# Altium PCB RGBParkLight16.PCBDOC
Units mm, origin at the board's own origin, x right, y up, seen from the top; angles counter-clockwise.
Board outline 152.4 x 101.6 mm, 2 copper layers (Top Layer, Bottom Layer); 19 components, 33 nets, 75 pads, 21 vias.
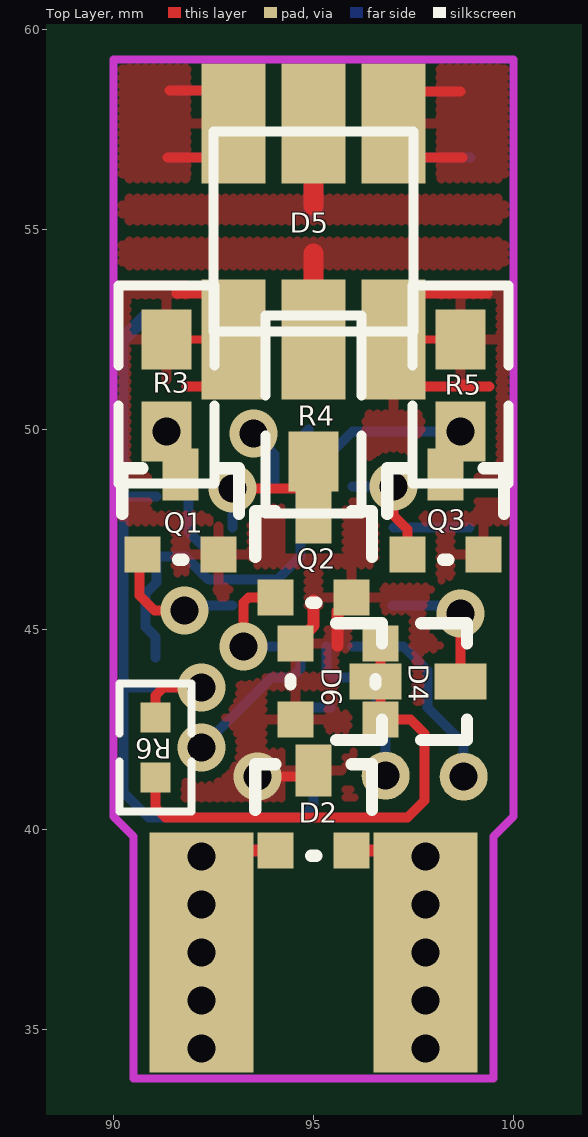
[diagram p0: Top Layer view]
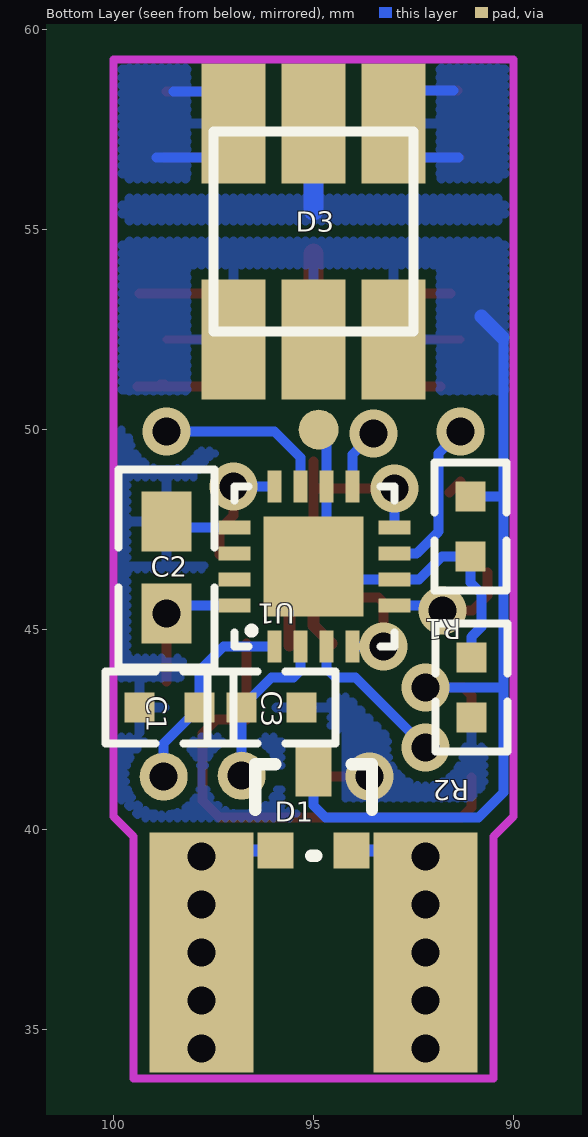
[diagram p1: Bottom Layer view, seen from below]

## Layer stack, top to bottom
Top Layer: signal copper 0.0356
Dielectric: dielectric 0.32, FR-4, Dk 4.8
Bottom Layer: signal copper 0.0356

## Board outline
25.4,25.4 177.8,25.4 177.8,127 25.4,127

## Design rules (kind name [scope] priority, off if disabled: settings)
Clearance [All] p1 off: gap=0.25
ComponentClearance [All] p1 off: gap=0 collisioncheckmode=0
PolygonConnect [All] p1: connectstyle=Relief reliefconductorwidth=0.254 reliefentries=4 polygonreliefangle="90 Angle"
RoutingLayers [All] p1: top layer=Horizontal bottom layer=Vertical
RoutingVias [All] p1: holewidth=0.711 width=1.27 viastyle="Through Hole" minholewidth=0.711 minwidth=1.27 maxholewidth=0.711 maxwidth=1.27
SolderMaskExpansion [All] p1: expansion=0.102
TestPointUsage [All] p1: valid=0 allowmultiple=FALSE
Testpoint [All] p1: side=15 testpointundercomponent=TRUE minsize=1.016 maxsize=2.54 preferedsize=1.524 minholesize=0 maxholesize=1.016 preferedholesize=0.813 testpointgrid=0.025 style=1023 order=1234567890
Width [All] p1: maxlimit=3 minlimit=0.2 preferedwidth=0.25
16 further rules are at their usual default settings.

## Components (designator, comment, footprint, x,y, rotation, side; value= is the part's Value field where it differs from the comment)
C1 "36pF" 0603 97.85,43.05 r0 bottom
C2 "10uF/6.3V" 0805 98.675,45.4 r90 bottom
C3 "32pF" 0603 96.8,43.05 r180 bottom
D1 "BAV70" SOT-23 95.95,39.475 r180 bottom
D2 "BAW56" SOT-23 94.05,39.475 r0 top
D3 "LED RGB" AF-5060 97,52.25 r180 bottom
D4 "BAT54C" SOT-23 96.675,44.65 r270 top (schematic designator D?)
D5 "LED RGB" AF-5060 97,57.65 r180 top
D6 "BZX84C4V7" SOT-23 94.55,44.65 r270 top
Q1 "DTC114YKA" SOT-23 90.725,46.875 r0 top
Q2 "DTC114YKA" SOT-23 94.05,45.8 r0 top
Q3 "DTC114YKA" SOT-23 97.35,46.875 r0 top
R1 "4k7 1%" 0603 91.075,48.325 r270 bottom
R2 "1k 1%" 0603 91.05,44.3 r270 bottom
R3 "200" 0805 91.325,52.25 r270 top
R4 "56" 0805 95,51.5 r270 top
R5 "56" 0805 98.675,52.25 r270 top
R6 "100" 0603 91.05,42.8 r270 top
U1 "PIC16F1823" QFN16-ML 95.975,44.575 r90 bottom

## Footprints (in the part's own frame and the unit in brackets; to place one, negate y for a bottom-side part, rotate by r counter-clockwise, add the part's x,y. Pads: shape width x height; smd on the part's side, far side on the other; paste and mask are expansions set on the pad)
0603 [mm]
  rect 0.75x0.75 smd: 1(0,0) 2(1.5,0)
  silkscreen extent -0.85,-0.9 2.35,0.9
0805 [mm]
  rect 1.5x1.25 smd: 1(0,0) 2(2.3,0)
  silkscreen extent -1.35,-1.2 3.6,1.2
AF-5060 [mm] "5060 SMD Package for 20 mA RGB LED with 6 pins"
  rect 1.6x3 smd: 1(0,0) 2(2,0) 3(4,0) 4(4,5.4) 5(2,5.4) 6(0,5.4)
  silkscreen extent -0.5,0.2 4.5,5.2
QFN16-ML [mm]
  rect 2.5x2.5 smd: 0(2,-0.975)
  rect 0.8x0.35 smd: 1(0,0) 2(0,-0.65) 3(0,-1.3) 4(0,-1.95) 9(4,-1.95) 10(4,-1.3) 11(4,-0.65) 12(4,0)
  rect 0.35x0.8 smd: 5(1.025,-3) 6(1.675,-3) 7(2.325,-3) 8(2.975,-3) 13(2.975,1) 14(2.325,1) 15(1.675,1) 16(1.025,1)
  silkscreen extent 0,-3 4,1
SOT-23 [mm]
  rect 0.9x0.9 smd: 1(0,0) 3(1.9,0)
  rect 0.9x1.3 smd: 2(0.95,2)
  silkscreen extent -0.51,-0.13 2.41,2.16

## Part data
C1 C2 C3: library part CAP, "Capacitor"
D1 D4: library part "DUAL DIODE BAV70"
D2: library part "DUAL DIODE BAW56"
D3 D5: library part LED
D6: library part ZENER1, "Zener Diode"
Q1 Q2 Q3: library part NPN1, "NPN Transistor"
R1 R2 R3 R4 R5 R6: library part RES1
U1: library part VOLTREG

## Free pads (board coordinates)
  rect 2.6x6 smd: 0(92.2,36.925) 0(97.8,36.925)
  rect 2.6x6 smd far side: 0(92.2,36.925) 0(97.8,36.925)
  round 1 smd far side: 0(94.875,50)
  round 1.2 hole 0.7: 0(96.8,41.35) 0(98.75,41.325)

## Via types
v1: diameter 1.2, hole 0.7, Top Layer to Bottom Layer, 21 vias

## Nets (pads, with @x,y where several pads share a name; then routed paths per layer and width w, separated by ;. In a path a pad name is that pad's centre, name@x,y a point inside that pad or via, vN(x,y) a via of type N, cw(c..) or ccw(c..) an arc to the next point about the centre after c; other vN are vias at no path point)
BLUE: Q3.1 U1.12 | length 2.9
  Top Layer w0.25: v1(97,48.575) 97,47.85 97.35,47.5 Q3.1
  Bottom Layer w0.25: U1.12 v1(97,48.575)
BLUE_IN: Q3.2 R5.2 U1.11 | length 4.3
  Bottom Layer w0.25: U1.11 95.325,49.3 95.975,49.95 v1(98.675,49.95)
D4AA: D3.4 | length 2.5
  Bottom Layer w0.25: 91.375,56.8 D3.4@92.75,56.8 ; 91.5,58.475 D3.4@92.625,58.475
D4AK: D5.3 | length 3
  Top Layer w0.25: 91.35,56.8 D5.3@92.875,56.8 ; 91.4,58.475 D5.3@92.825,58.475
D4BA: D3.5 | length 2.2
  Bottom Layer w0.5: 95,55.475 D3.5
D4BK: D5.2 | length 1.4
  Top Layer w0.5: 95,55.6 D5.2@95,57
D4CA: D3.6 | length 2.8
  Bottom Layer w0.25: D3.6@97.15,56.8 98.925,56.8 ; D3.6@97.425,58.45 98.5,58.45
D4CK: D5.1 | length 3.2
  Top Layer w0.25: D5.1@97.05,56.8 98.725,56.8 ; D5.1@97.175,58.45 98.675,58.45
GND: C1.2 C2.2 C3.2 D2.2 D6.1 D6.3 Q1.3 Q2.3 Q3.3 R2.2 U1.13 | length 6.3
  Top Layer w0.25: v1(93.6,41.325) 94.85,41.325 D2.2 ; Q2.3@95.6,45.45 Q2.3
  Top Layer w0.3: D6.1 95,45.1 95,45.725 ; 95.6,44.6 Q2.3@95.6,45.45
  Bottom Layer w0.25: C3.2@95.05,43.05 C3.2@95.425,43.05 ; U1.13@97,47.55 C2.2@98.9,47.55
GREEN: Q2.1 U1.4 | length 2.9
  Top Layer w0.25: v1(93.25,44.575) 93.25,45.675 93.375,45.8 Q2.1 Q2.1@94.05,45.625
  Bottom Layer w0.25: v1(93.25,44.575) U1.4
GREEN_IN: Q2.2 R4.2 U1.8 | length 4.4
  Top Layer w0.25: v1(92.975,48.525) 94.95,48.525 R4.2@95,48.475 ; Q2.2 R4.2
  Bottom Layer w0.25: U1.8 v1(92.975,48.525)
IN1: D1.1 D2.3 pad.0@97.8,36.925 | length 3.8
  Top Layer w0.25: pad.0@97.65,39.475 v1(97.8,39.325)
  Top Layer w0.3: D2.3 pad.0@97.65,39.475
  Bottom Layer w0.25: pad.0@97.65,39.475 v1(97.8,39.325)
  Bottom Layer w0.3: D1.1 pad.0@97.65,39.475
  other v1: 97.8,34.525 97.8,35.725 97.8,36.925 97.8,38.125
IN2: D1.3 D2.1 pad.0@92.2,36.925 | length 3.6
  Top Layer w0.25: v1(92.2,39.325) pad.0@92.35,39.475
  Top Layer w0.3: pad.0@92.35,39.475 D2.1
  Bottom Layer w0.3: pad.0@92.35,39.475 D1.3
  other v1: 92.2,34.525 92.2,35.725 92.2,36.925 92.2,38.125
MCLR: U1.3 | length 4.7
  Bottom Layer w0.25: v1(92.2,42.05) 93.037,42.887 ; 93.675,43.525 93.037,42.887 ; U1.3 94.675,44.025 94.45,43.8 93.95,43.8 93.037,42.887
NetD5_2: 
NetD5_4: D5.4 R3.1 | length 3.4
  Top Layer w0.2: R3.1 D5.4
  Top Layer w0.25: 91.575,53.4 D5.4@92.5,53.4 ; 91.825,51.075 D5.4@92.6,51.075
NetD5_5: D5.5 R4.1 | length 3.1
  Top Layer w0.25: D5.5@95,51.225 D5.5
  Top Layer w0.5: D5.5@95,52.3 95,54.4
NetD5_6: D5.6 R5.1 | length 6
  Top Layer w0.2: D5.6 R5.1
  Top Layer w0.25: D5.6@97,51.125 D5.6@97.475,51.125 ; D5.6@97.425,53.4 99.35,53.4 ; D5.6@97.475,51.075 98.725,51.075 ; 98.725,51.125 98.825,51.125 ; 98.825,51.075 99.4,51.075
NetQ2_2: 
NetU1_4: 
NetU1_6: 
NetU1_9: 
NetU1_11: 
NetU2_4: 
OSC1: C1.1 pad.0@98.75,41.325 U1.1 | length 5.1
  Bottom Layer w0.25: U1.1 97.25,44.575 97.85,43.975 C1.1 98.75,42.15 pad.0@98.75,41.325
OSC2: C3.1 pad.0@96.8,41.35 U1.2 | length 4.2
  Bottom Layer w0.25: U1.2 95.325,43.975 95.5,43.8 96.05,43.8 C3.1 pad.0@96.8,41.35
POWER: D1.2 D3.1 D3.2 D3.3 R1.1 R6.1 | length 22.7
  Top Layer w0.25: R6.1 91.05,43.35 91.25,43.55 v1(92.2,43.55)
  Bottom Layer w0.25: 90.25,43.55 v1(92.2,43.55) ; 90.25,52.325 90.25,40.925 90.875,40.3 94.7,40.3 95,40.6 D1.2 ; 90.3,48.325 R1.1
  Bottom Layer w0.35: 90.275,52.3 90.8,52.825
POWER_IN: pad.0@94.875,50 R1.2 R2.1 U1.0 U1.6 U1.10 | length 10.1
  Bottom Layer w0.25: R2.1 91.05,44.821 90.8,45.071 90.8,45.9 91.075,46.175 R1.2 91.792,46.825 92.367,46.25 94.1,46.25 94.675,46.825 94.675,49.8 pad.0@94.875,50
RC0: U1.9 | length 1.5
  Bottom Layer w0.25: v1(93.5,49.9) 94.025,49.375 U1.9
RED: Q1.1 U1.5 | length 3.1
  Top Layer w0.25: Q1.1@90.65,46.425 90.65,45.85 91.025,45.475 v1(91.775,45.475)
  Bottom Layer w0.25: v1(91.775,45.475) 91.9,45.6 U1.5
RED_IN: Q1.2 R3.2 U1.7 | length 4.4
  Top Layer w0.25: Q1.2@91.325,48.7 Q1.2@91.6,48.425
  Bottom Layer w0.25: v1(91.325,49.95) 91.875,49.4 91.875,47.449 92.424,46.9 U1.7
VCC: C2.1 D4.2 U1.16 | length 3.3
  Top Layer w0.25: D4.2 v1(98.675,45.4)
  Bottom Layer w0.25: U1.16 C2.1@98.575,45.6
ZENER: D4.1 D4.3 D6.2 R6.2 | length 12.6
  Top Layer w0.25: R6.2 91.05,40.55 91.3,40.3 97.35,40.3 97.775,40.725 97.775,42.4 97.425,42.75 D4.3 D4.1
pads on no net: U1.14 U1.15

## Polygon pours and split planes (outlines as drawn)
NetD5_5 on Top Layer (hatched 90Degree grid 0.2 track 0.25): 90.225,54.1 90.225,54.7 99.775,54.7 99.775,54.1
D4CK on Top Layer (hatched 90Degree grid 0.2 track 0.25, remove dead copper): 96.325,56.275 96.325,59.5 99.975,59.5 99.975,56.275
D4BK on Top Layer (hatched 90Degree grid 0.2 track 0.25, remove dead copper): 90.225,55.85 90.225,55.225 99.775,55.225 99.775,55.775 90.225,55.775
D4AK on Top Layer (hatched 90Degree grid 0.2 track 0.25, remove dead copper): 90.225,59.025 90.225,56.275 93.625,56.275 93.625,59.025
NetD5_4 on Top Layer (hatched 90Degree grid 0.2 track 0.25, remove dead copper): 93.675,48.675 93.675,53.625 90.225,53.625 90.225,48.675
NetD5_6 on Top Layer (hatched 90Degree grid 0.2 track 0.25, remove dead copper): 99.775,48.675 99.775,53.625 96.325,53.625 96.325,48.675
GND on Top Layer (hatched 90Degree grid 0.2 track 0.2, remove dead copper): 90.225,40.496 90.448,40.496 90.448,40.3 99.8,40.3 99.8,48.254 95.76,48.254 95.76,48.858 95.738,48.858 95.738,51.15 94.265,51.15 94.265,48.858 94.242,48.858 94.242,48.253 90.448,48.253 90.448,48.229 90.225,48.229
D4AA on Bottom Layer (hatched 90Degree grid 0.2 track 0.25, remove dead copper): 93.8,56.15 90.225,56.15 90.225,59.025 93.8,59.025
D4CA on Bottom Layer (hatched 90Degree grid 0.2 track 0.25, remove dead copper): 96.275,59.025 99.775,59.025 99.775,56.275 96.328,56.275 96.328,59.025
D4BA on Bottom Layer (hatched 90Degree grid 0.2 track 0.25, remove dead copper): 90.251,55.775 99.775,55.775 99.775,55.225 90.225,55.225 90.225,55.775
POWER on Bottom Layer (hatched 90Degree grid 0.2 track 0.25): 90.225,50.975 90.225,54.7 99.775,54.7 99.775,50.975
GND on Bottom Layer (hatched 90Degree grid 0.2 track 0.2, remove dead copper): 90.25,40.275 99.775,40.275 99.775,50 96.536,50 96.584,49.951 96.608,49.951 96.608,45.04 93.346,45.04 93.346,50 90.25,50

## Keep-outs
Keep-Out Layer:
  lines w0.2: 90,40.325 90.5,39.825 90.5,33.775 99.5,33.775 99.5,39.825 100,40.325 100,59.25 90,59.25 90,40.325